# Altium PCB RFID_CC1101_869MHz.PcbDoc (part 2 of 2)
Units mil, origin at the board's own origin, x right, y up, seen from the top; angles counter-clockwise.
Board outline 1670 x 2720 mil, 4 copper layers (Top Layer, GND Plane, POWER Plane, Bottom Layer), stack 16.312 mil thick; 110 components, 80 nets, 353 pads, 256 vias.
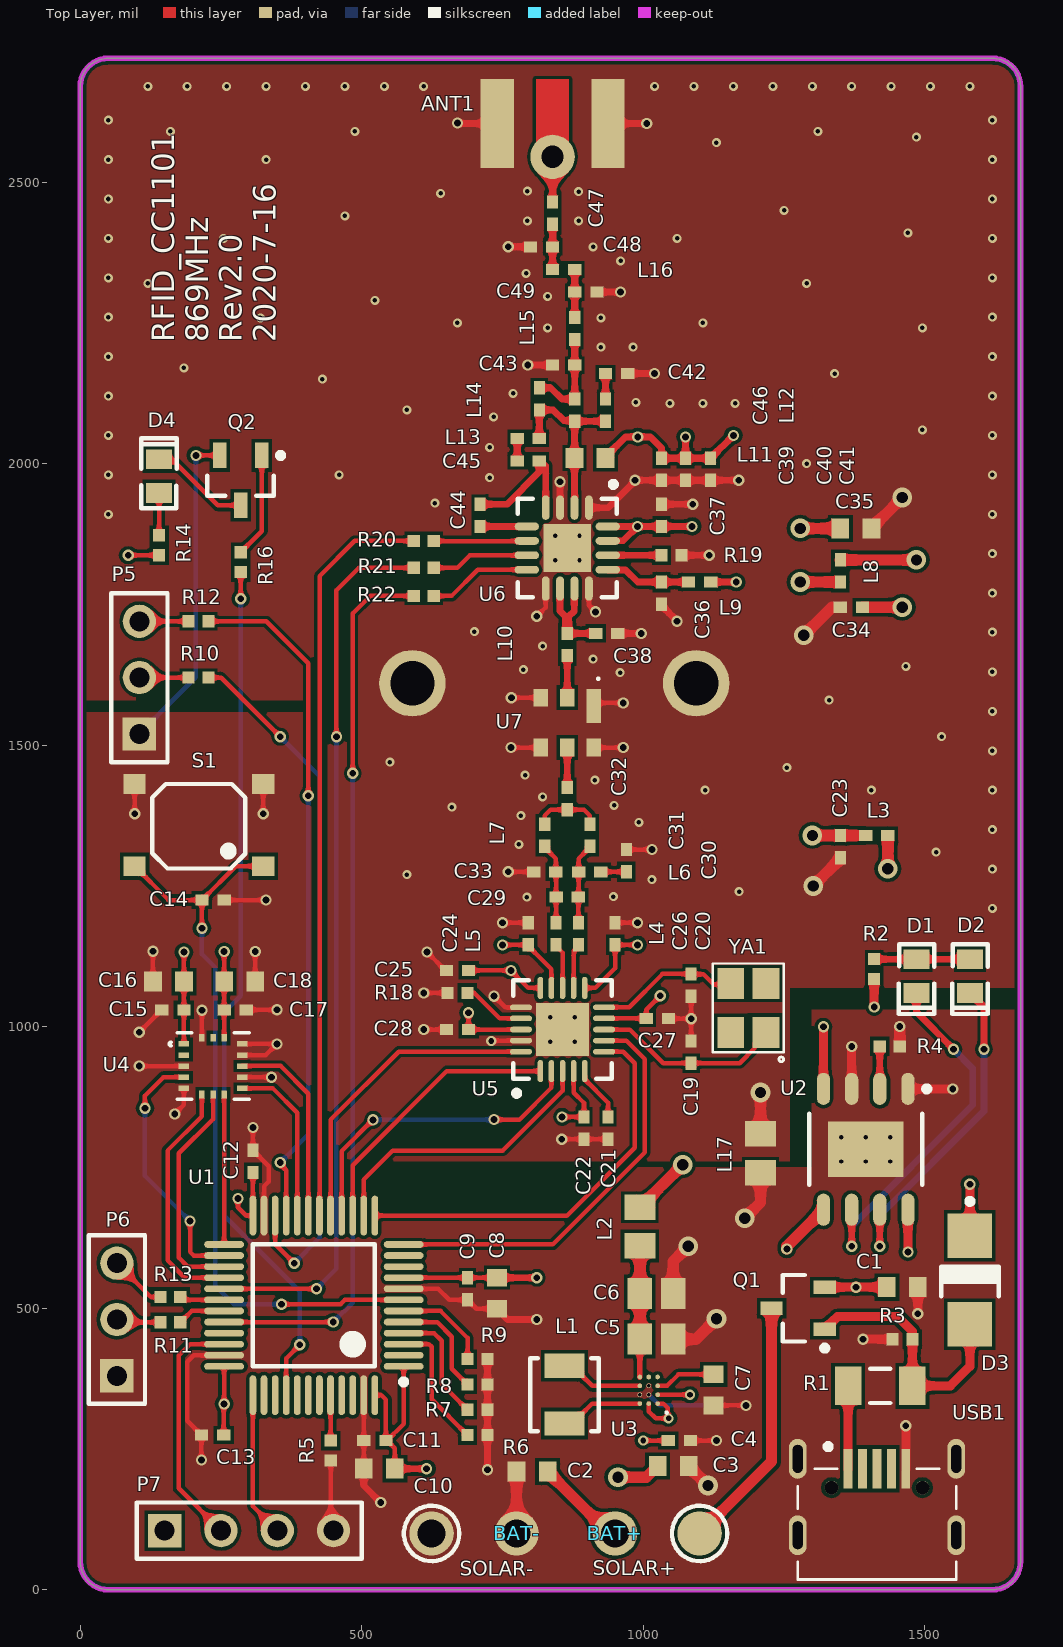
[diagram p0: Top Layer view]

## Other copper (continued)
POWER Plane (plane layer: these items are gaps in the copper): (continued)
  rectangle: 851.27,1838 878.27,1863
  rectangle: 1403,769.9 1430,794.9
  rectangle: 1360,770 1387,795
  lines w10: 0,2185 405,1780 405,1775 405,1525 ; 875,0 875,183.82 995,303.82 1076.18,385 1185,493.82 1185,642.56 ; 1310,0 1310,642.56 1302.44,642.56 1185,642.56 ; 1375,1525 405,1525 ; 1670,1105 1370,1105 1185,920 1185,642.56 ; 1672.5,2077.5 1375,1780 ; 405,1525 405,775 875,775 1375,1275 1375,1777.89 ; 1375,1777.89 1375,1780 ; 1375,1777.89 1375,1780

## Silkscreen, mask and mechanical layers (free items; w line width, h text height)
Top Overlay:
  text "RFID_CC1101 / 869MHz / Rev2.0 / 2020-7-16" at 347,2216 h40 r90